# Altium PCB uz_per_dcdc_converter_adapter.PcbDoc
Units mm, origin at the board's own origin, x right, y up, seen from the top; angles counter-clockwise.
Board outline 152.32 x 101.49 mm, 4 copper layers (Top Layer, Layer 1, Layer 2, Bottom Layer), stack 1.611 mm thick; 25 components, 16 nets, 111 pads, 10 vias.
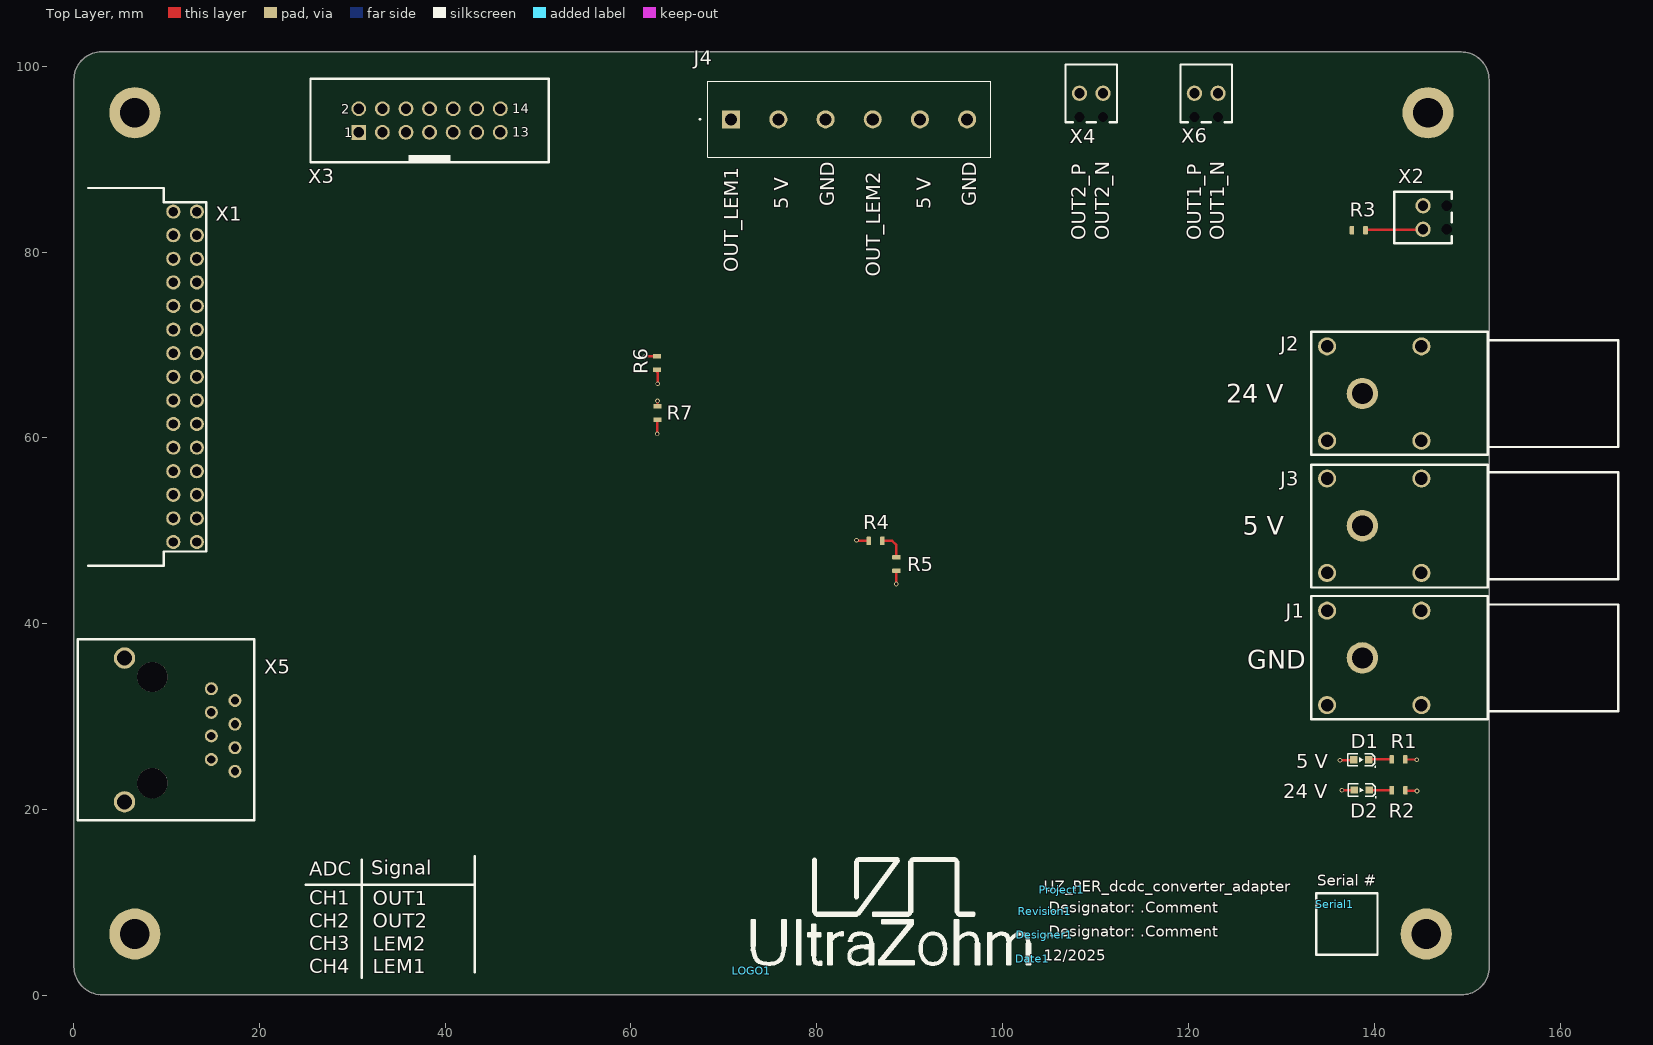
[diagram p0: Top Layer view]
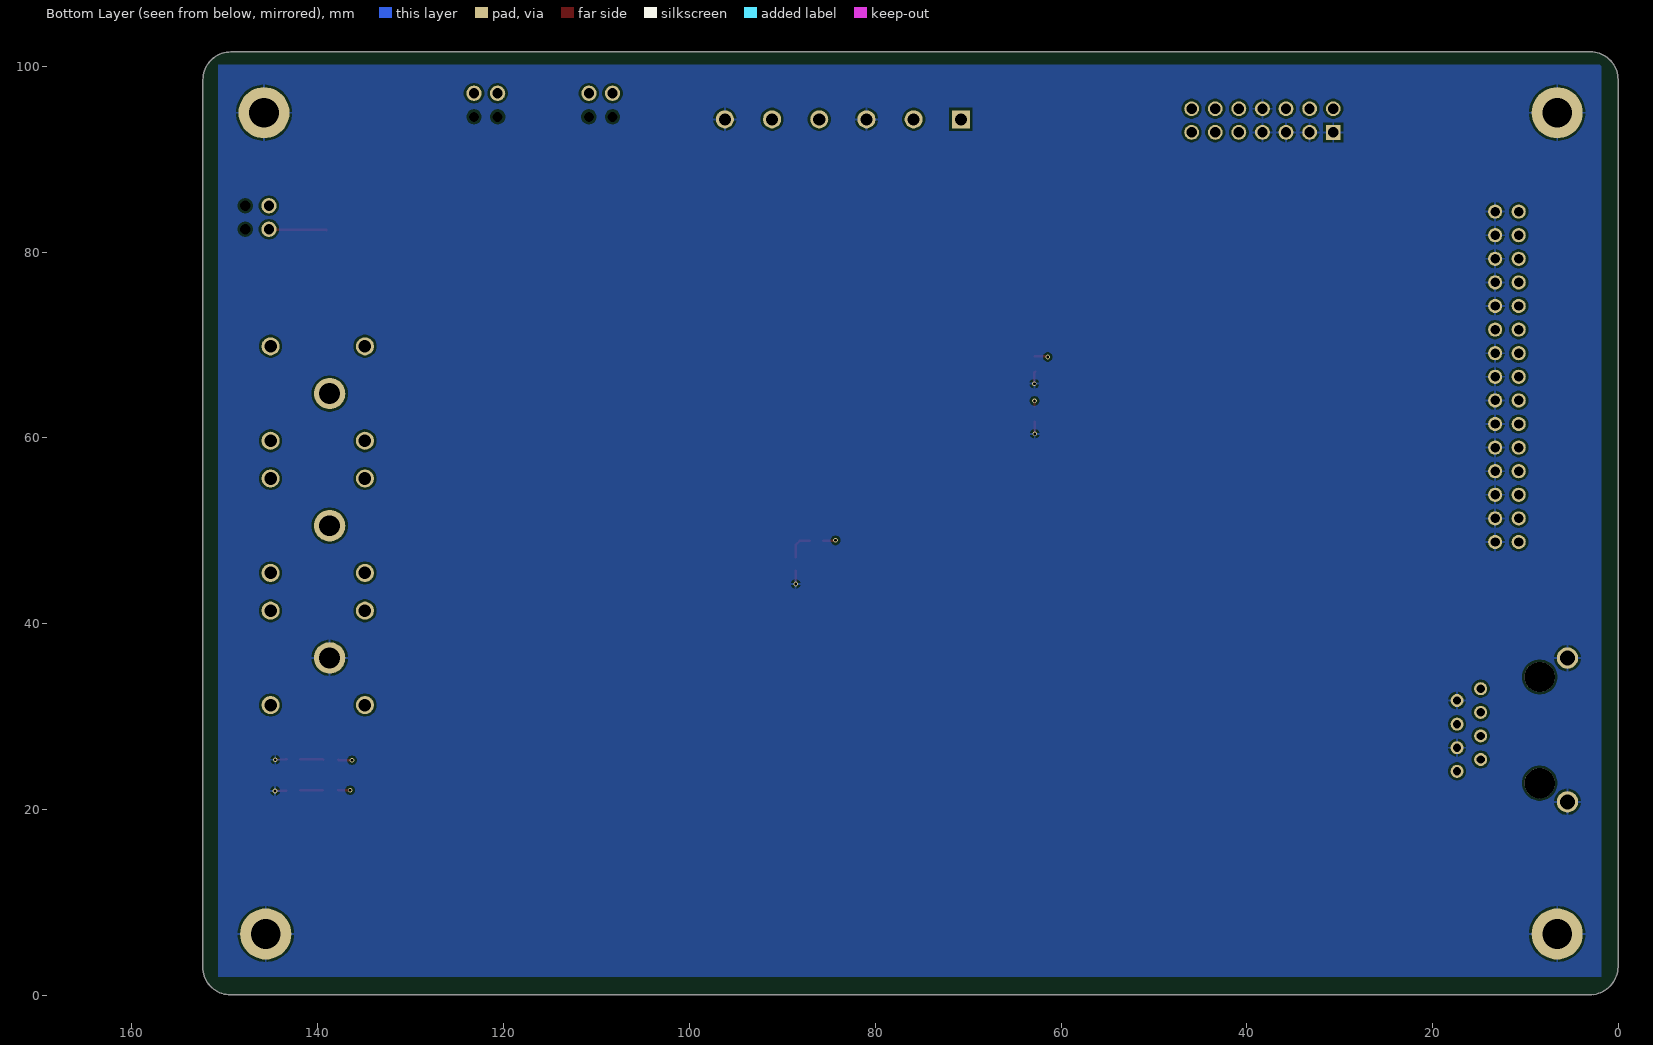
[diagram p1: Bottom Layer view, seen from below]
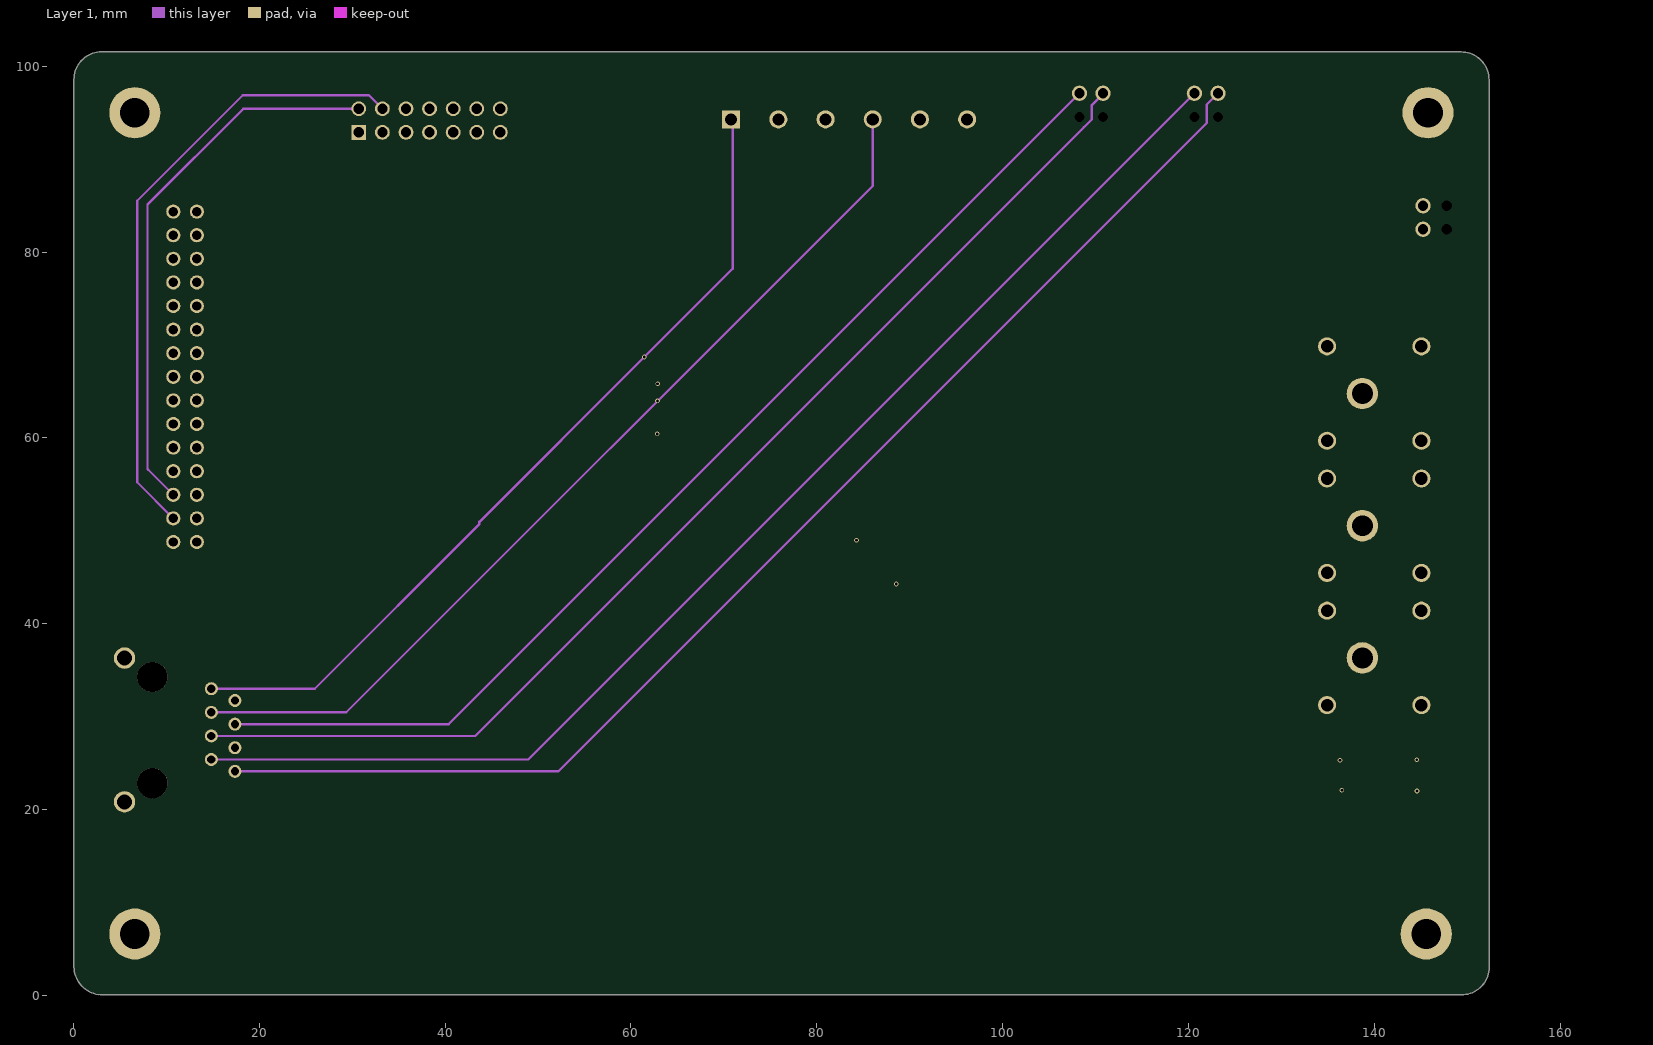
[diagram p2: Layer 1]
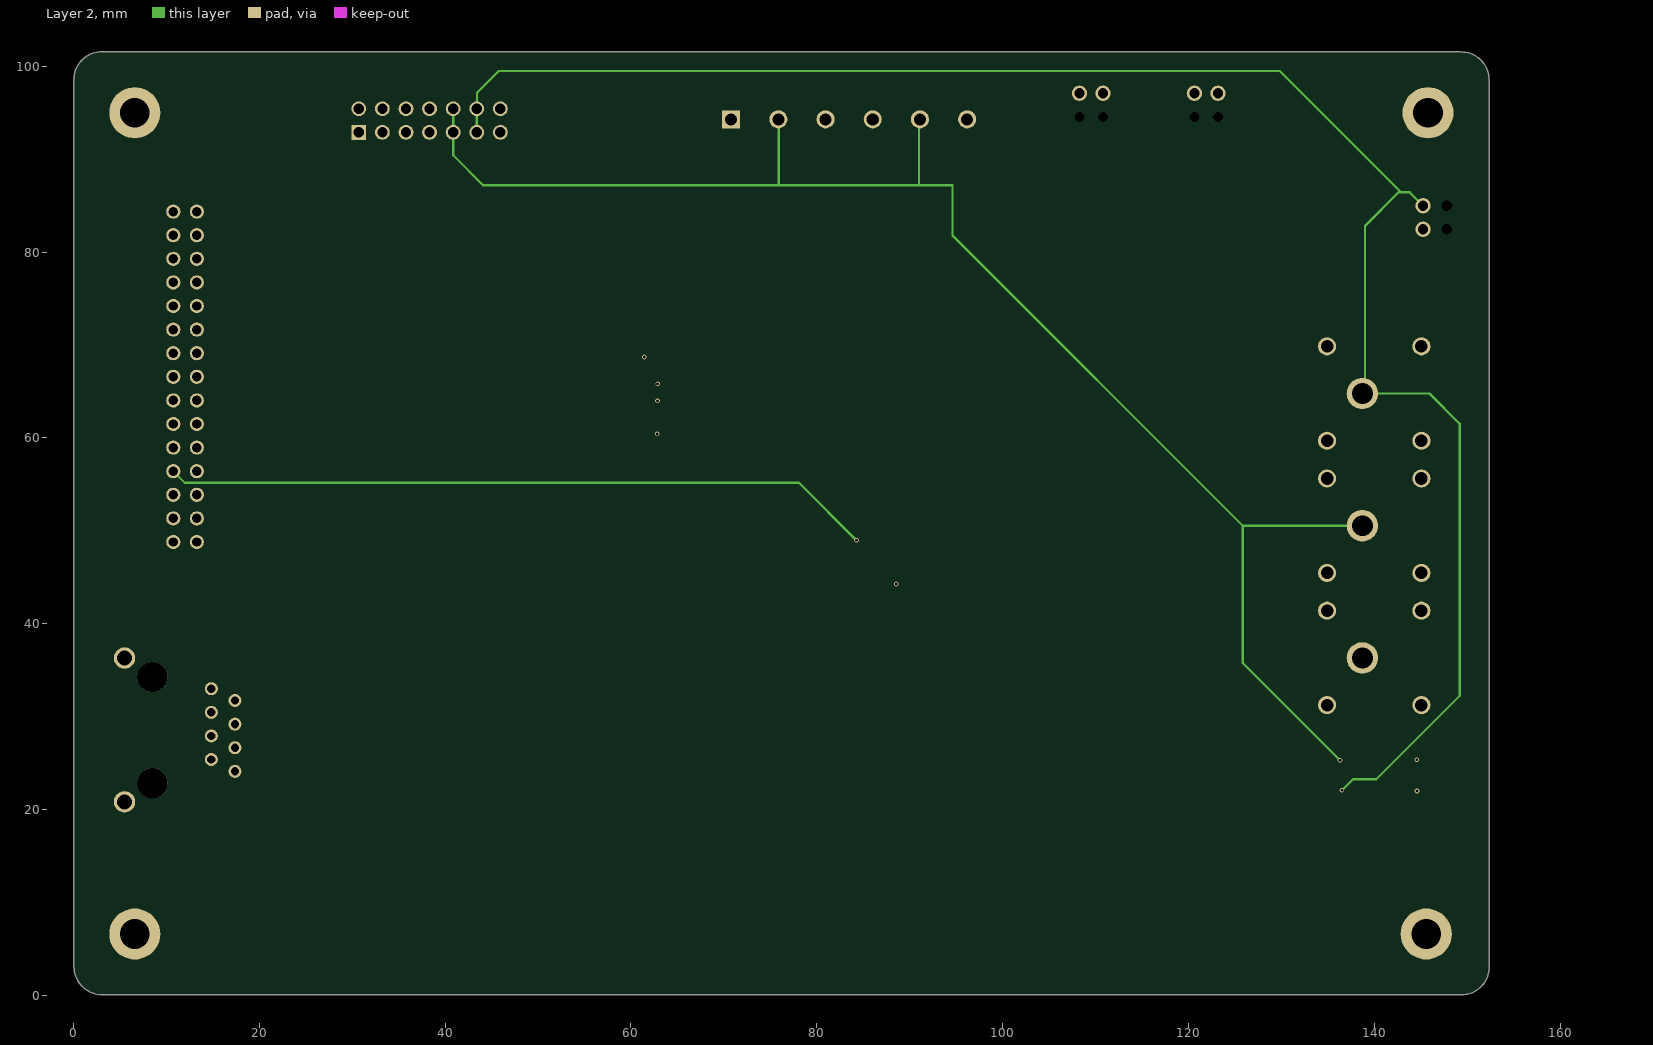
[diagram p3: Layer 2]
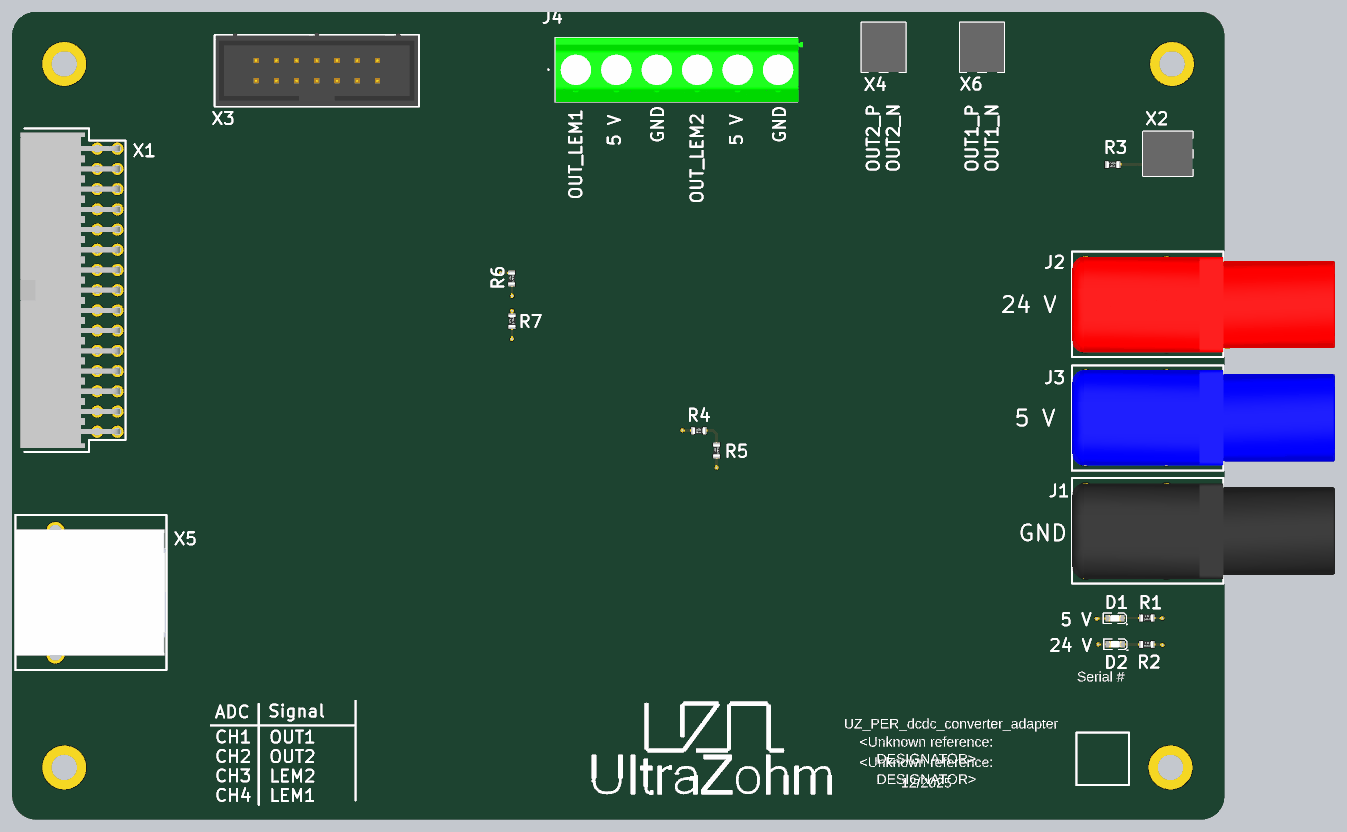
[diagram p4: 3D render of the assembled board from above, using the file's embedded part models]

## Layer stack, top to bottom
Top Solder: solder mask 0.01, Solder Resist, Dk 3.8
Top Layer: signal copper 0.035
Dielectric 2: prepreg 0.203, FR-4, Dk 4.6
Layer 1: signal copper 0.035
Dielectric 1: core 1.065, Core-036, Dk 4.6
Layer 2: signal copper 0.035
Dielectric 3: prepreg 0.203, FR-4, Dk 4.6
Bottom Layer: signal copper 0.035
Bottom Solder: solder mask 0.01, Solder Resist, Dk 3.8

## Board outline
0.051,3.073 0.046,98.575 0.055,98.575 cw(c3.025,98.575) 3.025,101.545 3.02,101.54 149.352,101.54 cw(c149.352,98.527) 152.365,98.527 152.37,3.019 cw(c149.401,3.019) 149.401,0.051 3.14,0.051 3.166,0.056 cw(c3.117,3.122)

## Design rules (kind name [scope] priority, off if disabled: settings)
Clearance [All] p1: gap=0.254 ignorepadtopadclearanceinfootprint=FALSE
HoleSize [All] p1: absolutevalues=TRUE maxlimit=7 minlimit=0.025 maxpercent=80.000 minpercent=20.000
PolygonConnect [All] p1: connectstyle=Relief reliefconductorwidth=0.254 reliefentries=4 polygonreliefangle="90 Angle" airgapwidth=0.254
RoutingVias [All] p1: holewidth=0.711 width=1.27 viastyle="Through Hole" minholewidth=0.711 minwidth=1.27 maxholewidth=0.711 maxwidth=1.27
SilkToSolderMaskClearance [IsPad] p1: minsilkscreentomaskgap=0.1 clearancetoexposedcopper=TRUE
SolderMaskExpansion [All] p1: expansion=0.102 istentingtop=FALSE
SupplyNets "Schematic Supply Nets_2" [InNet('+5V')] p1: voltage=0.000
SupplyNets "Schematic Supply Nets_1" [InNet('+24V')] p2: voltage=0.000
SupplyNets "Schematic Supply Nets" [InNet('GND')] p3: voltage=0.000
Width [All] p1: maxlimit=0.254 minlimit=0.254 preferedwidth=0.254
28 further rules are at their usual default settings.

## Classes and differential pairs
component class TopSheet: Date1 Designer1 LOGO1 Project1 Revision1 Serial1
component class adapter_pcb: D1 D2 J1 J2 J3 J4 R1 R2 R3 R4 R5 R6 R7 X1 X2 X3 X4 X5 X6

## Components (designator, comment, footprint, x,y, rotation, side; value= is the part's Value field where it differs from the comment)
D1 "LED Green" WL-SMCW_0603 138.608,25.349 r180 top
D2 "LED Green" WL-SMCW_0603 138.659,22.098 r180 top
Date1 "12/2025" COMMENT 103.276,3.937 r0 top
Designer1 "ZC" Designator:comment 104.546,6.502 r0 top
J1 "FCR7350B, PCB mount 4mm jack, BLACK" FCR7350 149.703,36.322 r0 top value="PCB mount 4mm jack, Black	FCR7350B, 1000V, 24A"
J2 "FCR7350R, PCB mount 4mm jack, RED" FCR7350 149.703,64.77 r0 top value="PCB mount 4mm jack, Red FCR7350R, 1000V, 24A"
J3 "FCR7350L, PCB mount 4mm jack, BLUE" FCR7350 149.703,50.546 r0 top value="PCB mount 4mm jack, Blue FCR7350L, 1000V, 24A"
J4 "1729160" 1729160 83.49,94.285 r0 top
LOGO1 "UZ Logo" UZ_Logo_small 73.025,2.667 r0 top
Project1 "UZ_PER_dcdc_converter_adapter" COMMENT 106.384,11.354 r0 top
R1 "1k8" R_0603_TE 142.621,25.4 r90 top
R2 "20k" R_0603_TE 142.621,22.073 r90 top
R3 "100R" R_0603_TE 138.328,82.347 r270 top
R4 "10k" R_0603_TE 86.328,48.92 r270 top
R5 "10k" R_0603_TE 88.57,46.431 r180 top
R6 "10k" R_0603_TE 62.814,68.047 r180 top
R7 "10k" R_0603_TE 62.865,62.687 r180 top
Revision1 "Rev1.0" Designator:comment 104.546,9.068 r0 top
Serial1 "Serial #" SERIAL 135.763,9.779 r0 top
X1 "IPL1-115-01-L-D-RA-K" IPL1-115-01-XX-D-RA 1.092,66.573 r90 top
X2 "1725656" 1725656 148.363,83.718 r90 top
X3 "61201421621" 61201421621 38.329,94.158 r0 top
X4 "1725656" 1725656 109.55,93.985 r0 top
X5 "R-RJ45R10P-B000" R-RJ45R10P-B000 10.998,28.575 r270 top
X6 "1725656" 1725656 121.92,93.985 r0 top

## Footprints (in the part's own frame and the unit in brackets; to place one, negate y for a bottom-side part, rotate by r counter-clockwise, add the part's x,y. Pads: shape width x height; smd on the part's side, far side on the other; paste and mask are expansions set on the pad)
1725656 [mm]
  round 1.65 hole 1.1: 1(-1.27,3.1) 2(1.27,3.1)
  round 0.55 hole 1.1 unplated: 3(-1.27,0.56) 4(1.27,0.56)
  silkscreen extent -2.77,0 2.77,6.2, body extent -2.77,0 2.77,6.2, height 8
1729160 [mm]
  rect 1.95x1.95 hole 1.3: 1(-12.7,0)
  round 1.95 hole 1.3: 2(-7.62,0) 3(-2.54,0) 4(2.54,0) 5(7.62,0) 6(12.7,0)
  silkscreen extent -16.1,-4.08 15.24,4.08, body extent -15.14,-4.05 15.91,4.05, height 10
61201421621 [mm] "14 pins, straight, gold plating"
  rect 1.6x1.6 hole 1.1: 1(-7.62,-1.27)
  round 1.6 hole 1.1: 2(-7.62,1.27) 3(-5.08,-1.27) 4(-5.08,1.27) 5(-2.54,-1.27) 6(-2.54,1.27) 7(0,-1.27) 8(0,1.27) 9(2.54,-1.27) 10(2.54,1.27) 11(5.08,-1.27) 12(5.08,1.27) 13(7.62,-1.27) 14(7.62,1.27)
  silkscreen extent -12.82,-4.5 12.82,4.5, body extent -12.72,-4.42 12.72,4.75, height 9.13
COMMENT [mm] "prints out the comment of a component"
Designator:comment [mm] "prints out designator and comment of a component"
FCR7350 [mil]
  round 132.87 hole 88.58: 1(-432.22,0)
  round 76.5 hole 53.15: 2(-581.83,200) 3(-581.83,-200) 4(-181.83,-200) 5(-181.83,200)
  silkscreen extent -649,-260 652,262, body extent -648,-236 651,236, height 485
IPL1-115-01-XX-D-RA [mil]
  round 60 hole 40 mask+3: 1(-700,-380) 2(-600,-380) 3(-500,-380) 4(-400,-380) 5(-300,-380) 6(-200,-380) 7(-100,-380) 8(0,-380) 9(100,-380) 10(200,-380) 11(300,-380) 12(400,-380) 13(500,-380) 14(600,-380) 15(700,-380) 16(-700,-480) 17(-600,-480) 18(-500,-480) 19(-400,-480) 20(-300,-480) 21(-200,-480) 22(-100,-480) 23(0,-480) 24(100,-480) 25(200,-480) 26(300,-480) 27(400,-480) 28(500,-480) 29(600,-480) 30(700,-480)
  silkscreen extent -800,-520 800,-20, body extent -780,-492 780,0, height 315
R-RJ45R10P-B000 [mm]
  round 1.4 hole 0.9: A1(-4.425,3.842) A2(-3.155,6.382) A3(-1.885,3.842) A4(-0.615,6.382) A5(0.655,3.842) A6(1.925,6.382) A7(3.195,3.842) A8(4.465,6.382)
  round 3.25 hole 3.25 unplated: MH3(-5.69,-2.508) MH4(5.74,-2.508)
  round 2.3 hole 1.6: S1(-7.725,-5.5) S2(7.75,-5.5)
  silkscreen extent -9.75,-10.55 9.73,8.45, body extent -7.9,-10.43 7.9,8.37, height 14.5
R_0603_TE [mm] "Vishay D0603 1.55 x 0.85 (+0.1/-0.05) 0.3 +/- 0,2mm Kontakte"
  rrect33% 0.9x0.5 smd: 1(0,0.73) 2(0,-0.73)
  body extent -0.42,-0.78 0.43,0.77, height 0.45
SERIAL [mm]
  silkscreen extent -2,-5.4 4.6,1.2
UZ_Logo_small [mm] "logo width 3cm"
  silkscreen extent -0.05,0.57 29.94,12.12
WL-SMCW_0603 [mm] "SMD Mono-color Chip LED, body 1.6x0.8mm"
  rect 0.8x0.8 smd: 1(-0.8,0) 2(0.8,0)
  silkscreen extent -1.59,-0.65 1.45,0.83, body extent -0.8,-0.4 0.8,0.4, height 0.7

## Part data
D1 D2: library part 19-217/GHC-YR1S2/3T, "LED GREEN 520~535NM 112~258MCD@20MA TOP VIEW 0603 ROHS", Color=green, Device Package=0603, Forward Current I_f="20 mA", Forward Voltage U_f="3.3 V", LCSC Part Number=C72043, Manufacturer="Everlight Elec", Nominal Power="83 mW", Operating Temperature="-40 - 85 °C", Component Type="LED Diode", ComponentLink1Description=Datasheet, ComponentLink1URL=https://datasheet.lcsc.com/szlcsc/Everlight-Elec-19-217-GHC-YR1S2-3T_C72043.pdf, Created from="T. Wendt", Created On="03.03.2021 10:06:23", Last Updated="04.03.2021 09:02:49", Light Intensity="285 mcd", Live Cycle Status=1, Manufacturer Part Number=19-217/GHC-YR1S2/3T, Mounting Type=SMD, PartID=7, Stock number="not stored", Supplier 1=LCSC, Supplier 2=Mouser, Supplier Part Number 1=C72043, Supplier Part Number 2=638-19217GHCYR1S23T, Type=Standard, Wavelength="530 nm"
Date1: library part 5, "Create a project parameter named \"FinDate\" this is the value of this component. It is printed on the PCB. Once the parameter is updated (e.g. new revision) it gets updated on the PCB as well", Manufacturer="PCB Manufacturer", Manufacturer Part Number="Project End Date", Component Type="Date of Project Finalization", Created from="T. Wendt", Created On="01.03.2021 09:01:41", Last Updated="01.03.2021 09:01:41", Live Cycle Status=1, PartID=5, Type="Standard (No BOM)"
Designer1: library part 4, "Create a project parameter named \"Author\" this is the value of this component. It is printed on the PCB. Once the parameter is updated (e.g. new revision) it gets updated on the PCB as well", Manufacturer="PCB Manufacturer", Manufacturer Part Number="Project Author", Component Type="Project Author", Created from="T. Wendt", Created On="01.03.2021 08:53:41", Last Updated="01.03.2021 09:20:27", Live Cycle Status=1, PartID=4, Type="Standard (No BOM)"
J1: library part FCR7350B, "FCR7350B, 1000V, 24A, BLACK", Device Package=THT, LCSC Part Number=C7437327, Manufacturer=Cliff, Operating Temperature="-40°C - 80°C", Supplier Part Number 1=3185-FCR7350B-ND, Component Type="PCB mount 4mm jack, Black", ComponentLink1Description=datasheet, ComponentLink1URL=https://www.cliffuk.co.uk/products/testleads/sockets/S16NPC.pdf, ComponentLink2Description=drawing, ComponentLink2URL=https://media.digikey.com/pdf/Data%20Sheets/Cliff%20Electronic%20LTD%20PDF's/FCR7350_Drawing.pdf, Created from=DHufnagel, Created On="13.06.2022 10:18:11", Last Updated="21.02.2024 15:21:29", Live Cycle Status=1, Manufacturer Part Number=FCR7350B, Minimum Order=1, Mounting Type=THT, PartID=6, Series=S16N-PC, Stock number="not stored", Supplier 1=Digi-Key, Supplier 2=farnell, Supplier 3=LCSC, Supplier Part Number 2=1854507, Supplier Part Number 3=C7437327, Type="PCB mount 4mm jack, Black	FCR7350B, 1000V, 24A"
J2: library part FCR7350R, "FCR7350B, 1000V, 24A, RED", Device Package=THT, LCSC Part Number=C7437326, Manufacturer=Cliff, Operating Temperature="-40°C - 80°C", Supplier Part Number 1=3185-FCR7350R-ND, Component Type="PCB mount 4mm jack, Red", ComponentLink1Description=datasheet, ComponentLink1URL=https://www.cliffuk.co.uk/products/testleads/sockets/S16NPC.pdf, ComponentLink2Description=drawing, ComponentLink2URL=https://media.digikey.com/pdf/Data%20Sheets/Cliff%20Electronic%20LTD%20PDF's/FCR7350_Drawing.pdf, Created from=DHufnagel, Created On="13.06.2022 10:18:11", Last Updated="21.02.2024 15:19:13", Live Cycle Status=1, Manufacturer Part Number=FCR7350R, Minimum Order=1, Mounting Type=THT, PartID=7, Series=S16N-PC, Stock number="not stored", Supplier 1=Digi-Key, Supplier 2=farnell, Supplier 3=LCSC, Supplier Part Number 2=1854508, Supplier Part Number 3=C7437326, Type="PCB mount 4mm jack, Red FCR7350R, 1000V, 24A"
J3: library part FCR7350L, "FCR7350B, 1000V, 24A, BLUE", Device Package=THT, Manufacturer=Cliff, Operating Temperature="-40°C - 80°C", Supplier Part Number 1=3185-FCR7350L-ND, Component Type="PCB mount 4mm jack, Blue", ComponentLink1Description=datasheet, ComponentLink1URL=https://www.cliffuk.co.uk/products/testleads/sockets/S16NPC.pdf, ComponentLink2Description=drawing, ComponentLink2URL=https://media.digikey.com/pdf/Data%20Sheets/Cliff%20Electronic%20LTD%20PDF's/FCR7350_Drawing.pdf, Created from=DHufnagel, Created On="13.06.2022 10:18:11", Last Updated="28.06.2022 13:58:37", Live Cycle Status=1, Manufacturer Part Number=FCR7350L, Minimum Order=1, Mounting Type=THT, PartID=8, Series=S16N-PC, Stock number="not stored", Supplier 1=Digi-Key, Supplier 2=farnell, Supplier Part Number 2=1854511, Type="PCB mount 4mm jack, Blue FCR7350L, 1000V, 24A"
J4: "Fixed Mounting Block, 6 Pins, 5.08mm Pitch, 26-16 AWG", Device Package=Connector, Manufacturer="Phoenix Contact", Operating Temperature="-40 - 100  °C", Supplier Part Number 1=651-1729160, Component Type="Phoenix Connector", ComponentLink1Description=Homepage, ComponentLink1URL=https://www.phoenixcontact.com/us/products/1729160/pdf, Created from=DHufnagel, Created On="20.04.2023 12:39:10", Last Updated="20.04.2023 12:48:08", Live Cycle Status=1, Manufacturer Part Number=1729160, Mounting Type=THT, Number of positions=6, Number of rows=1, PartID=56, Stock number="not stored", Supplier 1=Mouser, Type=Connector
LOGO1: library part 1, "Official Project Logo of the UltraZohm", Manufacturer="PCB Manufacturer", Manufacturer Part Number="UltraZohm Logo", Component Type=Logo, ComponentLink1Description=Homepage, ComponentLink1URL=https://ultrazohm.com, Created from="T. Wendt", Created On="19.02.2021 16:55:56", Last Updated="02.03.2021 14:31:24", Live Cycle Status=1, PartID=1, Type="Standard (No BOM)"
Project1: library part 2, "Create a project parameter named \"ProjectNameCustom\" this is the value of this component and it is printed on the PCB.", Manufacturer="PCB Manufacturer", Manufacturer Part Number="Project Name", Component Type="Project Name", Created from="T. Wendt", Created On="01.03.2021 08:43:57", Last Updated="01.03.2021 09:07:27", Live Cycle Status=1, PartID=2, Type="Standard (No BOM)"
R1: library part UZgen_R_0603_1k8, "Generic resistor", Device Package=0603, LCSC Part Number=C4177, Manufacturer=UZgen, Tolerance="1 %", Created from=UZgenTool, Created On="02.07.2024 17:29:49", Last Updated="02.07.2024 17:29:49", Manufacturer Part Number=UZgen_R_0603_1k8, Mounting Type=SMD, PartID=227
R2: library part UZgen_R_0603_20k, "Generic resistor", Device Package=0603, Manufacturer=UZgen, Tolerance="1 %", Created from=UZgenTool, Created On="02.07.2024 17:29:50", Last Updated="02.07.2024 17:29:50", Manufacturer Part Number=UZgen_R_0603_20k, Mounting Type=SMD, PartID=251
R3: library part UZgen_R_0603_100R, "Generic resistor", Device Package=0603, Manufacturer=UZgen, Tolerance="1 %", Created from=UZgenTool, Created On="02.07.2024 17:29:48", Last Updated="02.07.2024 17:29:48", Manufacturer Part Number=UZgen_R_0603_100R, Mounting Type=SMD, PartID=197
R4 R5 R6 R7: library part UZgen_R_0603_10k, "Generic resistor", Device Package=0603, LCSC Part Number=C25804, Manufacturer=UZgen, Tolerance="1 %", Created from=AGeiger, Created On="02.07.2024 14:34:53", Last Updated="02.07.2024 14:37:16", Manufacturer Part Number=UZgen_R_0603_10k, Mounting Type=SMD, PartID=1
Revision1: library part 3, "Create a project parameter named \"ProjectRevision\" this is the value of this component. It is printed on the PCB. Once the parameter is updated (e.g. new revision) it gets updated on the PCB as well", Manufacturer="PCB Manufacturer", Manufacturer Part Number="Project Revision", Component Type="Project Revision", Created from="T. Wendt", Created On="01.03.2021 08:50:34", Last Updated="01.03.2021 09:28:36", Live Cycle Status=1, PartID=3, Type="Standard (No BOM)"
Serial1: library part 6, "Field to put in a serial number", Manufacturer="PCB Manufacturer", Manufacturer Part Number="Serial Number", Component Type="Serial Number", Created from="T. Wendt", Created On="02.03.2021 14:31:24", Last Updated="02.03.2021 14:31:24", Live Cycle Status=1, PartID=6, Type="Standard (No BOM)"
X1: "Terminal Assembly, Double Row, Right Angle, Thru-Hole, 2.54 mm x 2.54 mm Pitch, 30 Pins", Device Package=Connector, LCSC Part Number=C7423882, Manufacturer=SAMTEC, Component Type="Samtec Connector", ComponentLink1Description=Homepage, ComponentLink1URL=https://www.samtec.com/products/ipl1, Created from=TWendt, Created On="12.02.2021 15:31:18", Last Updated="25.01.2024 19:08:01", Live Cycle Status=1, Manufacturer Part Number=IPL1-115-01-L-D-RA-K, Number of positions=30, Number of rows=2, PartID=34, Stock number="not stored", Supplier 1=SAMTEC, Supplier Part Number 1=IPL1-115-01-L-D-RA-K, Type=Connector
X2 X4 X6: "Fixed Mounting Block, 2 Pins, 2.54mm Pitch", Device Package=THT, Manufacturer="Phoenix Contact", Operating Temperature=-, Supplier Part Number 1=651-1725656, Component Type="Phoenix Connector", ComponentLink1Description=Datasheet, ComponentLink1URL=https://www.mouser.de/datasheet/2/324/4/1725656-1437410.pdf, Created from=MGremer, Created On="08.06.2021 15:54:18", Last Updated="13.03.2024 09:50:47", Live Cycle Status=1, Manufacturer Part Number=1725656, Mounting Type=THT, Number of positions=2, Number of rows=1, PartID=49, Series=MPT, Stock number="not stored", Supplier 1=Mouser, Type=Connector
X3: "2.54mm Double Row 14-pol Vertical Male Pin Box Header", Device Package=Connector, Manufacturer=Wurth, Component Type="Wurth Connector", ComponentLink1Description=Homepage, ComponentLink1URL=https://www.we-online.de/katalog/de/BHD_2_54_MALE_BOX_HEADER_6120XX21621?sq=61201421621#61201421621, ComponentLink2Description=Datasheet, ComponentLink2URL=https://www.we-online.de/katalog/datasheet/61201421621.pdf, Created from=TWilfling, Created On="29.04.2021 14:12:30", Last Updated="29.04.2021 14:52:34", Live Cycle Status=1, Manufacturer Part Number=61201421621, Mounting Type=THT, Number of positions=14, Number of rows=2, PartID=45, Stock number="not stored", Supplier 1=Wurth, Supplier Part Number 1=61201421621, Type=Connector
X5: "RJ45Receptacle 1 Shielded Bend insert Without LED 0℃~+70℃ Plugin Ethernet Connectors / Modular Connectors (RJ45 RJ11) ROHS", LCSC Part Number=C386758, Manufacturer="Ckmtw(Shenzhen Cankemeng)", Operating Temperature="0 °C to +70 °C", ComponentLink1Description=Datasheet, ComponentLink1URL=https://jlcpcb.com/api/file/downloadByFileSystemAccessId/8588892085580021760, Created from=KIlhan, Created On="20.03.2025 09:19:07", Last Updated="18.05.2025 18:44:47", Manufacturer Part Number=R-RJ45R10P-B000, Mounting Type=THT, PartID=57, Series=RJ45, Supplier 1=LCSC, Supplier Part Number 1=C386758

## Free pads (board coordinates)
  round 5.5 hole 3.2: 1(6.604,6.604) 1(6.604,94.996) 1(145.599,6.604) 1(145.796,94.996)

## Via types
v1: diameter 0.5, hole 0.3, Top Layer to Bottom Layer, 10 vias

## Nets (pads, with @x,y where several pads share a name; then routed paths per layer and width w, separated by ;. In a path a pad name is that pad's centre, name@x,y a point inside that pad or via, vN(x,y) a via of type N, cw(c..) or ccw(c..) an arc to the next point about the centre after c; other vN are vias at no path point)
+5V: D1.2 J3.1 J4.2 J4.5 X3.9 X3.10 | length 169.7
  Top Layer w0.254: v1(136.322,25.298) 137.757,25.298 D1.2
  Layer 2 w0.254: X3.10@40.869,95.37 X3.9 ; X3.10 X3.9 ; J4.2@75.895,94.285 75.895,87.198 ; J4.5@91.008,93.724 91.008,87.198 ; 94.613,87.198 94.613,81.79 125.857,50.546 ; 94.615,87.198 91.008,87.198 ; v1(136.322,25.298) 125.857,35.763 125.857,50.546 ; J3.1 125.857,50.546 ; X3.9 40.869,90.424 44.094,87.198 75.895,87.198 ; 75.895,87.198 91.008,87.198
+24V: D2.2 J2.1 X2.2 X3.11 X3.12 | length 196
  Top Layer w0.254: v1(136.525,22.073) 137.833,22.073 D2.2
  Layer 2 w0.254: X3.11 X3.12 43.433,95.452 43.433,97.145 45.78,99.492 129.829,99.492 142.884,86.436 ; v1(136.525,22.073) 137.715,23.263 140.23,23.263 149.213,32.246 149.213,61.509 145.952,64.77 J2.1 139.013,65.059 139.013,82.819 142.63,86.436 142.884,86.436 ; X2.2 143.815,86.436 142.884,86.436
GND: J1.1 J4.3 J4.6 pad.1 R1.2 R2.2 R5.1 R6.1 R7.1 X1.16 X1.17 X1.18 X1.19 X1.20 X1.21 X1.22 X1.23 X1.24 X1.26 X1.27 X1.28 X1.29 X1.30 X3.1 X3.3 X3.5 X3.7 X3.8 X5.A2 X5.A6 X5.S1 X5.S2 | length 6.6
  Top Layer w0.254: R6.1@62.789,67.132 62.873,67.048 v1(62.873,65.837) ; v1(62.84,60.427) R7.1@62.84,61.765 ; v1(88.57,44.272) R5.1 ; R1.2 143.453,25.4 143.474,25.379 144.547,25.379 v1(144.577,25.349) ; R2.2@143.384,22.039 143.389,22.034 144.564,22.034 v1(144.602,21.996)
NetD1_1: D1.1 R1.1 | length 2.5
  Top Layer w0.254: D1.1 139.459,25.4 R1.1
NetD2_1: D2.1 R2.1 | length 2.4
  Top Layer w0.254: D2.1@139.484,22.073 R2.1
NetR3_1: R3.1 X2.1 | length 6.2
  Top Layer w0.254: R3.1 139.109,82.398 145.212,82.398 X2.1
NetR4_1: R4.1 R5.2 | length 3
  Top Layer w0.254: R4.1 88.113,48.92 88.57,48.463 R5.2
OUT_LEM1: J4.1 R6.2 X5.A1 | length 92.2
  Top Layer w0.254: v1(61.443,68.707) 61.509,68.707 61.569,68.767 62.805,68.767 R6.2@62.817,68.78
  Layer 1 w0.254: X5.A1 25.964,33 43.693,50.728 43.693,50.957 v1(61.443,68.707) 70.942,78.207 J4.1@70.942,94.034
OUT_LEM2: J4.4 R7.2 X5.A3 | length 102.4
  Top Layer w0.254: R7.2 v1(62.865,63.983)
  Layer 1 w0.254: X5.A3 29.368,30.46 86.03,87.122 J4.4@86.03,94.27
OUT_N1: X5.A8 X6.2 | length 137.2
  Layer 1 w0.254: X5.A8 52.202,24.11 121.979,93.887 121.979,95.874 X6.2
OUT_N2: X4.2 X5.A5 | length 125.6
  Layer 1 w0.254: X5.A5 42.972,27.92 43.241,27.92 108.745,93.423 109.611,94.29 109.611,95.835 110.82,97.044 X4.2
OUT_P1: X5.A7 X6.1 | length 135.5
  Layer 1 w0.254: X5.A7 48.945,25.38 X6.1
OUT_P2: X4.1 X5.A4 | length 119
  Layer 1 w0.254: X5.A4 40.385,29.19 X4.1
SWITCH_BOT: X1.3 X3.2 | length 59.4
  Layer 1 w0.254: X1.3 8.05,56.568 7.976,56.642 7.976,85.115 18.288,95.428 X3.2
SWITCH_CON: R4.2 X1.4 | length 78
  Top Layer w0.254: v1(84.277,48.971) 84.303,48.946 85.573,48.946 R4.2
  Layer 2 w0.254: X1.4 11.989,55.169 78.08,55.169 v1(84.277,48.971)
SWITCH_TOP: X1.2 X3.4 | length 67.5
  Layer 1 w0.254: X1.2 6.858,55.22 6.858,85.522 18.212,96.876 31.801,96.876 X3.4
pads on no net: J1.2 J1.3 J1.4 J1.5 J2.2 J2.3 J2.4 J2.5 J3.2 J3.3 J3.4 J3.5 R3.2 X1.1 X1.5 X1.6 X1.7 X1.8 X1.9 X1.10 X1.11 X1.12 X1.13 X1.14 X1.15 X1.25 X2.3 X2.4 X3.6 X3.13 X3.14 X4.3 X4.4 X5.MH3 X5.MH4 X6.3 X6.4

## Polygon pours and split planes (outlines as drawn)
GND on Bottom Layer "GND_L04_P000" (solid, remove dead copper, pour order 0): 1.854,100.169 150.723,100.169 150.723,1.981 1.854,1.981

## Silkscreen, mask and mechanical layers (free items; w line width, h text height)
Top Overlay:
  lines w0.254: 25.019,11.887 43.18,11.887 ; 31.039,1.905 31.039,14.605 ; 43.205,2.464 43.205,14.986
  text "GND" at 81.864,84.937 h1.52 r90
  text "GND" at 97.18,84.937 h1.52 r90
  text "5 V" at 92.253,84.633 h1.52 r90
  text "5 V" at 76.911,84.582 h1.52 r90
  text "OUT2_P" at 108.966,81.255 h1.52 r90
  text "OUT2_N" at 111.481,81.255 h1.52 r90
  text "OUT1_P" at 121.361,81.255 h1.52 r90
  text "OUT1_N" at 123.876,81.255 h1.52 r90
  text "OUT_LEM1" at 71.577,77.827 h1.52 r90
  text "OUT_LEM2" at 86.817,77.32 h1.52 r90
  text "24 V" at 124.104,63.805 h2
  text "5 V" at 125.832,49.555 h2
  text "GND" at 126.34,35.128 h2
  text "5 V" at 131.597,24.46 h1.52
  text "24 V" at 130.2,21.234 h1.52
  text "Signal" at 32.055,12.979 h1.52
  text "ADC" at 25.374,12.878 h1.52
  text "CH1" at 25.374,9.728 h1.52
  text "OUT1" at 32.207,9.703 h1.52
  text "CH2" at 25.374,7.281 h1.52
  text "OUT2" at 32.207,7.256 h1.52
  text "CH3" at 25.374,4.834 h1.52
  text "LEM2" at 32.207,4.809 h1.52
  text "CH4" at 25.374,2.388 h1.52
  text "LEM1" at 32.207,2.362 h1.52
Mechanical 1:
  lines w0.1: 0.055,98.575 cw(c3.025,98.575) 3.025,101.545 ; 149.352,101.54 cw(c149.352,98.527) 152.365,98.527 ; 149.401,0.051 ccw(c149.401,3.019) 152.37,3.019
  lines w0.102: 0.051,3.073 ccw(c3.117,3.122) 3.166,0.056
  lines w0.254: 0.046,3.073 0.046,98.575 ; 3.02,101.54 149.352,101.54 ; 3.14,0.051 149.401,0.051 ; 152.365,98.527 152.37,3.019

## Text inside footprints (layer, text, board x,y; h text height)
X3: Top Overlay "1" at 29.149,92.358 h1.02; Top Overlay "2" at 28.849,94.898 h1.02; Top Overlay "13" at 47.209,92.418 h1.02; Top Overlay "14" at 47.209,94.958 h1.02